# Altium PCB main.PcbDoc (part 3 of 16)
Units mil, origin at the board's own origin, x right, y up, seen from the top; angles counter-clockwise.
Board outline 8394.75 x 5164.44 mil, 7 copper layers (Top Layer 1, Layer 2, Layer 3, Unused, Layer 4_pow, Layer 5_gnd, Bottom 6+gnd), stack 64.043 mil thick; 364 components, 409 nets, 1932 pads, 1061 vias.
Unrouted connection lines stored in the file: 2.
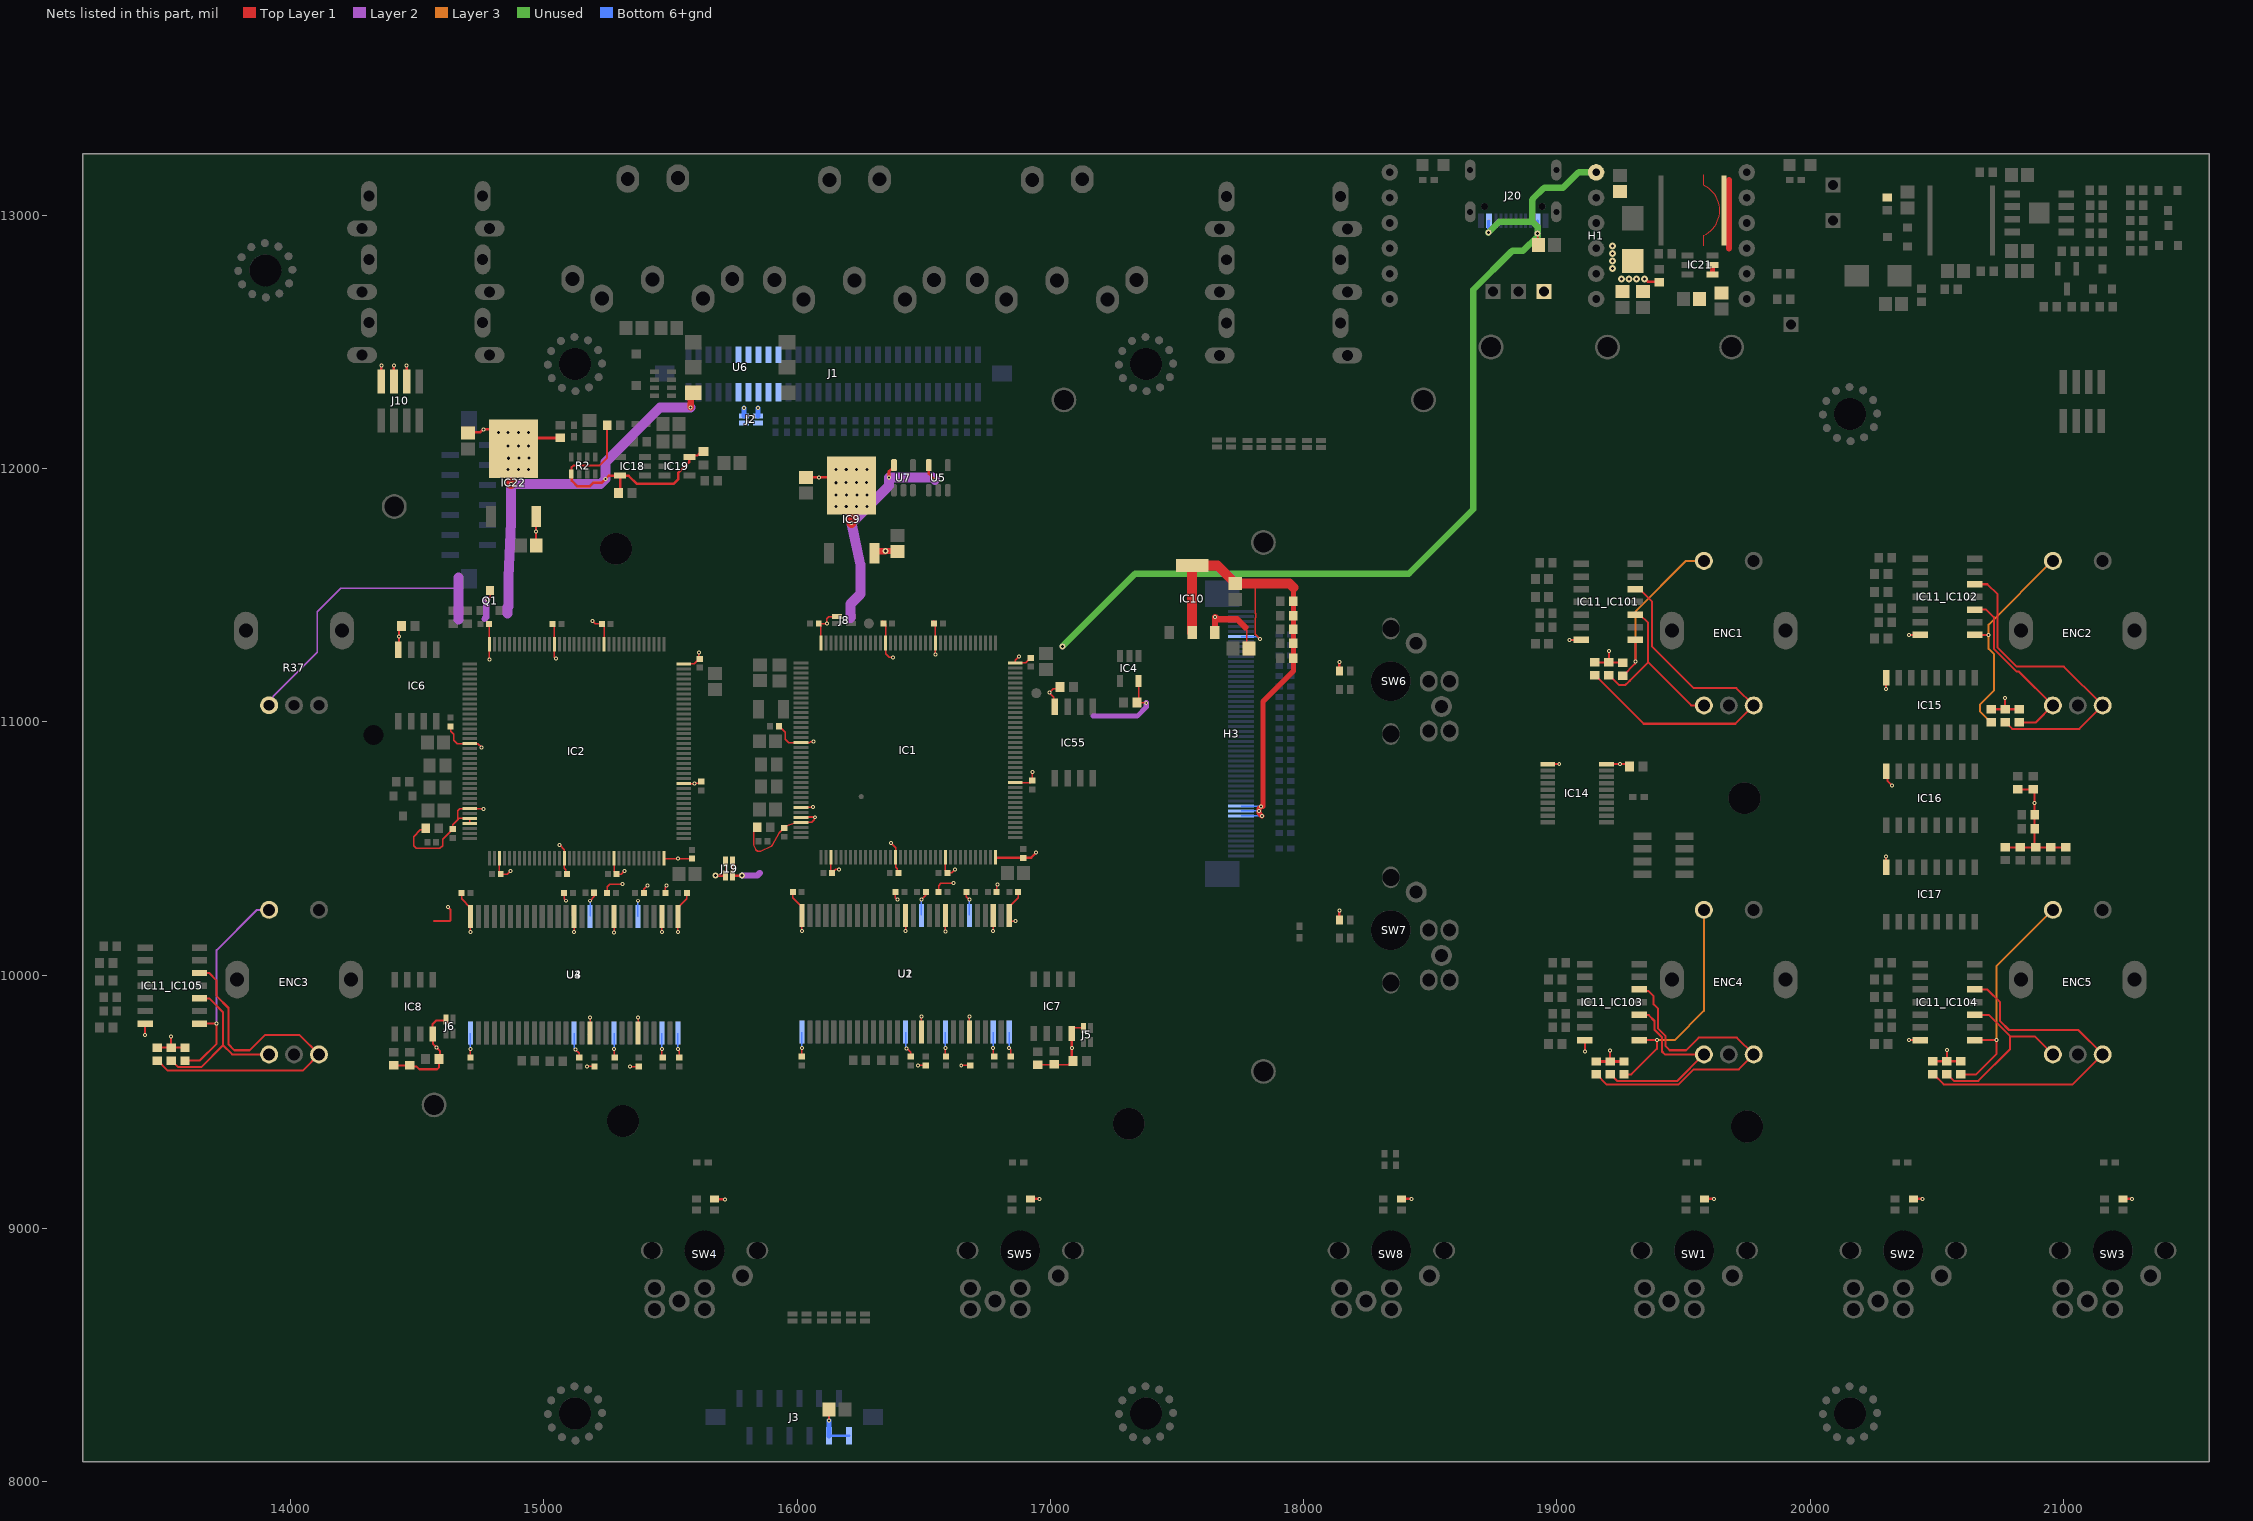
[diagram p6: the nets of this part, all layers, seen from the top]

## Via types
v1: diameter 15.75, hole 7.87, Top Layer 1 to Bottom 6+gnd, tented both sides, 961 vias
v2: diameter 27.56, hole 11.81, Top Layer 1 to Bottom 6+gnd, 45 vias
v3: diameter 23.62/23.62/23.62/23.62/23.62/23.62/23.62 (per signal layer), hole 12, Top Layer 1 to Bottom 6+gnd, tented top, 42 vias
v4: diameter 15.75, hole 7.87, Top Layer 1 to Bottom 6+gnd, 10 vias
v5: diameter 23.62/23.62/23.62/23.62/23.62/23.62/23.62 (per signal layer), hole 12, Top Layer 1 to Bottom 6+gnd, tented bottom, 3 vias

## Nets (pads, with @x,y where several pads share a name; then routed paths per layer and width w, separated by ;. In a path a pad name is that pad's centre, name@x,y a point inside that pad or via, vN(x,y) a via of type N, cw(c..) or ccw(c..) an arc to the next point about the centre after c; other vN are vias at no path point) (continued)
+5V: (continued)
  Top Layer 1 w10: J10.7@14358.32,12347.02 v1@14358.32,12411.19 ; J10.5@14408.32,12344.14 v1(14408.32,12408.32) ; J10.3@14458.32,12344.14 v1(14458.32,12408.32) ; SW4.4@15677.84,9115.31 v1(15714.71,9115.31) ; SW5.4@16921.17,9116.81 v1(16958.05,9116.81) ; SW7.4@18140.8,10218.18 v1(18140.8,10255.06) ; SW6.4@18140.8,11200.77 v1(18140.8,11237.65) ; SW8.4@18386.42,9116.81 v1(18426.81,9116.81) ; R32.2@19155,9659.41 R29.2@19210,9659.41 R35.2@19265,9659.41 ; 19357.8,12739.99 19358.98,12738.81 R17.2@19407.8,12738.81 ; SW1.4@19582.58,9116.81 v1(19619.45,9116.81) ; SW2.4@20407.69,9116.81 v1(20444.56,9116.81) ; R33.2@20485,9660 R36.2@20595,9660 ; R27.2@20715,11050 R25.2@20770,11050 R23.2@20825,11050 ; SW3.4@21234.46,9116.81 v1(21271.33,9116.81)
  Top Layer 1 w25: IC9.3@16305,11666.18 16305,11666.32 16312.19,11673.5 16347.58,11673.5 v3(16348.83,11674.76) 16394.36,11674.76 C72.2@16395.61,11673.5 ; IC10.3@17649.72,11353.82 17650.08,11354.17 v1(17650.08,11414.45) 17658.81,11405.72 17738.16,11405.72 17769.89,11373.99
  Bottom 6+gnd w10: J3.10@16126.77,8181.18 J3.12@16205.51,8181.18
  Bottom 6+gnd w20: J2.4@15790,12208.78 v1(15790,12240) ; v1@15845,12240 v1(15845.12,12239.88) J2.2@15845.12,12208.78 ; v1(16125.14,8241.03) 16125.14,8182.81 J3.10@16126.77,8181.18
  other v1: 19110.27,9699.49 19210.16,9703.74 20540.16,9704.33 20390.67,9743.98 13528.31,9758.74 13425.71,9764.49 20300.16,10468.15 20770.16,11094.33 20299.84,11129.49 20390.67,11343.98 14358.32,12408.32
  other v2: 19255.11,12749.08 19285.11,12749.08 19315.11,12749.08 19345.11,12749.08 19219.81,12789.99 19219.81,12819.99 19219.81,12849.99 19219.81,12879.99
+5V_Out: J1.41 J1.42 J1.43 J1.44 J1.45 J1.46 J1.47 J1.48 J1.49 J1.50 J2.1 J2.3
+MCU: C11.1 C12.1 C13.1 C14.1 C15.1 C16.1 C17.1 C18.1 C19.1 C20.1 C21.1 C22.1 C23.1 C24.1 C25.1 C26.1 C27.1 C28.1 C29.1 C30.1 C31.1 C32.1 C33.1 C34.1 C35.1 C36.1 C37.1 C38.1 C39.1 C40.1 C41.1 C42.1 C43.1 C44.1 C45.1 C46.1 C47.1 C48.1 C49.1 C50.1 C51.1 C52.1 C53.1 C54.1 C55.1 C56.1 C57.1 C58.1 C59.1 C60.1 C61.1 C63.2 C64.2 C65.2 C71.2 C80.1 C81.1 C86.2 C87.2 C88.2 H1.6 IC1.17 IC1.30 IC1.32 IC1.33 IC1.39 IC1.52 IC1.62 IC1.72 IC1.84 IC1.108 IC1.121 IC1.131 IC1.144 IC2.17 IC2.30 IC2.32 IC2.33 IC2.39 IC2.52 IC2.62 IC2.72 IC2.84 IC2.108 IC2.121 IC2.131 IC2.144 IC4.5 IC6.8 IC7.8 IC8.8 IC9.4 IC18.5 IC19.5 IC22.4 IC55.8 J5.1 J6.1 J8.4 J19.1 J19.2 J19.3 J19.4 J20.A4B9 J20.B4A9 Q1.3 R2.1 R5.1 R6.1 R13.2 R14.2 R15.2 R16.2 R37.1 R103.1 R139.1 U1.1 U1.3 U1.9 U1.14 U1.27 U1.43 U1.49 U2.1 U2.3 U2.9 U2.14 U2.27 U2.43 U2.49 U3.1 U3.3 U3.9 U3.14 U3.27 U3.43 U3.49 U4.1 U4.3 U4.9 U4.14 U4.27 U4.43 U4.49 U5.5 U6.6 U7.5 | length 18724.1
  Top Layer 1 w5: R6.1@14534.32,10579.63 14528.28,10573.59 14513.02,10573.59 14486.84,10547.41 14486.84,10510.42 14496.42,10500.84 14588.81,10500.84 14599.91,10511.94 14599.91,10537.57 14639.57,10577.23 C22.1@14640.36,10577.23 14640.36,10595.07 14659.91,10614.63 ; C23.1@14631.48,10982.94 14632.6,10981.82 14632.6,10962.67 14644.54,10950.74 14644.54,10928.26 14658.17,10914.63 IC2.17@14706.68,10914.63 ; C60.1@14675.2,10324.63 14675.2,10302.23 14710.4,10267.03 U3.27@14710.4,10232.09 14710.4,10232.03 v1@14710.4,10170.19 ; IC2.33@14707.15,10599.2 IC2.32@14707.15,10618.88 14664.16,10618.88 14659.91,10614.63 ; IC2.17@14707.15,10914.16 14739.83,10914.16 14754.48,10899.5 v1(14754.48,10898.26) ; C47.1@14709.06,9674.63 14709.85,9674.63 C47.1@14710.33,9675.05 v1(14710.27,9709.43) ; v1(14761.48,10656.26) 14760.49,10657.25 14708.15,10657.25 IC2.30@14707.15,10658.25 14668.53,10658.25 14659.91,10649.63 14659.91,10614.63 ; v1(14777.89,11483.41) 14788.15,11493.68 Q1.3@14788.15,11518.19 ; C24.1@14784.4,11386.87 14785.42,11385.85 IC2.144@14785.42,11307.38 14784.86,11306.83 v1@14784.86,11247.1 ; IC2.39@14824.79,10461.87 14824.79,10404.75 C29.1@14829.91,10399.63 14855.85,10399.63 v1(14868.48,10412.26) ; C25.1@15034.4,11386.87 15041.33,11379.94 IC2.131@15041.33,11307.38 15041.33,11256.42 v1(15047.48,11250.26) ; v1(15062,10514.63) 15080.7,10495.93 IC2.52@15080.7,10461.87 15080.7,10422.52 15086.42,10416.8 15086.42,10405.44 C30.1@15092.23,10399.63 ; C59.1@15080.2,10324.63 15080.2,10302.02 v1(15088.11,10294.12) ; U3.14@15112.6,10275.1 15112.6,10239.53 U3.14@15120.1,10232.03 ; v1@15119.85,10170.19 U3.14@15119.85,10232.03 ; v1(15124.6,9706.63) 15139.85,9691.39 C48.1@15139.85,9674.63 ; v1(15169.85,9639.63) 15170.2,9639.98 C49.1@15199.85,9639.98 ; U3.43@15175.71,9764.27 15182.84,9771.4 U3.43@15182.84,9771.46 v1@15182.84,9833.24 ; v1(15182.6,10294.12) 15199.85,10311.37 C58.1@15199.85,10324.63 ; v1(15192.48,11398.26) 15203.87,11386.87 C26.1@15229.4,11386.87 15238.18,11378.09 IC2.121@15238.18,11307.38 ; C57.1@15250.2,10324.63 15250.2,10349.98 15259.74,10359.52 15309.21,10359.52 v1(15310,10360.31) ; v1(15277.08,9709.31) 15277.08,9677.39 C50.1@15279.85,9674.63 ; v1(15277.35,10167.96) U3.9@15277.35,10267.01 ; IC2.62@15277.55,10461.87 15277.55,10410.1 15287.23,10400.42 C31.1@15287.23,10399.63 15305.85,10399.63 v1(15318.48,10412.26) ; v1(15339.85,9639.63) 15374.5,9639.63 C51.1@15374.85,9639.98 ; U3.49@15371.82,9736.4 U3.49@15371.82,9771.46 v1@15371.82,9833.24 ; C56.1@15394.5,10324.63 15394.5,10339.27 v1(15409.85,10354.63) ; v1(15466.06,9709.31) 15466.06,9678.42 C52.1@15469.85,9674.63 ; v1@15466.31,10170.19 U3.3@15466.31,10232.09 U3.3@15466.31,10267.03 ; IC2.72@15476.29,10459.98 v1(15530.6,10459.98) C28.1@15584.91,10459.98 ; C55.1@15479.5,10324.63 15479.5,10346.05 15485.01,10351.56 v1(15485.01,10354.47) ; v1(15529.05,9709.31) 15529.05,9707.02 15535.24,9700.83 C53.1@15535.24,9674.63 ; v1@15529.3,10170.19 U3.1@15529.3,10232.09 15529.3,10267.03 15564.5,10302.23 C54.1@15564.5,10324.63 ; IC2.84@15552.67,10756.68 15595.31,10756.68 v1(15595.83,10757.2) 15613.43,10757.2 C32.1@15620.89,10764.66 ; IC2.108@15552.67,11229.12 15593.96,11229.12 15614.12,11249.27 C27.1@15614.91,11249.27 15612.48,11251.7 v1(15612.48,11275.26) ; J19.3@15718.15,10393.82 J19.1@15718.15,10448.94 ; J19.4@15745.71,10393.82 J19.2@15745.71,10448.94 ; R5.1@15842.56,10583.82 15829.19,10567.62 15829.19,10516.22 ccw(c15836.69,10516.22) 15829.76,10513.35 15835.99,10498.31 ccw(c15850.2,10504.19) 15856.65,10490.24 15898.11,10509.41 ccw(c15894.96,10516.22) 15901.5,10512.54 15929.46,10562.26 cw(c15936,10558.58) 15930.56,10563.75 15938.5,10572.11 C13.1@15948.6,10581.42 15958.69,10590.73 15988.86,10599.98 IC1.33@16015.39,10603.38 16057.72,10603.38 16068.47,10614.14 16068.47,10621.75 v1(16070.53,10623.8) ; C12.1@15938.15,10983.82 15938.15,10974.92 15952.78,10960.29 15952.78,10932.45 15966.41,10918.82 16014.92,10918.82 IC1.17@16015.39,10918.35 16049.38,10918.35 16052.31,10921.27 16056.83,10921.27 16057.21,10921.66 16063.07,10921.66 v1(16065.13,10923.71) ; C40.1@15983.5,10328.82 15983.5,10306.42 16018.7,10271.22 U1.27@16018.7,10236.22 v1@16018.7,10174.38 ; IC1.32@15988.86,10623.07 IC1.32@16015.39,10623.07 ; IC1.30@15988.86,10659.04 IC1.30@16015.39,10662.44 16041.93,10664.1 v1(16062.93,10664.1) ; C33.1@16017.36,9678.82 C33.1@16018.15,9678.82 16018.57,9679.24 v1(16018.57,9713.62) ; C11.1@16085.47,11388.82 C11.1@16086.09,11388.2 ; IC1.144@16093.66,11311.57 16093.66,11380.63 C11.1@16086.09,11388.2 ; IC1.39@16133.03,10466.06 16133.03,10408.94 C21.1@16138.15,10403.82 16138.15,10404.61 16147.46,10413.92 16148.25,10413.92 16152.3,10417.97 v1(16166.04,10417.97) ; J8.4@16158.03,11416.38 16125.71,11416.38 16117.24,11407.9 v1(16117.24,11388.2) C11.1@16086.09,11388.2 ; C14.1@16338.15,11398.82 16338.15,11398.03 16344.09,11392.09 16349.57,11386.61 IC1.131@16349.57,11311.57 16349.57,11269.87 16364.24,11255.2 v1(16379.24,11255.2) ; v1(16370.24,10522.2) 16388.94,10503.5 IC1.52@16388.94,10466.06 16388.94,10426.71 16394.66,10420.99 16394.66,10409.63 C20.1@16400.47,10403.82 ; C41.1@16388.5,10328.82 16388.5,10306.21 v1(16396.41,10298.31) ; U1.14@16420.9,10279.29 16420.9,10243.72 U1.14@16428.4,10236.22 ; v1@16428.15,10174.38 U1.14@16428.15,10236.22 ; v1(16432.9,9710.82) 16448.15,9695.58 C34.1@16448.15,9678.82 ; v1(16478.15,9643.82) 16478.5,9644.17 C35.1@16508.15,9644.17 ; U1.43@16484.01,9768.46 U1.43@16491.14,9775.59 v1@16491.14,9837.43 ; v1(16490.9,10298.31) 16508.15,10315.56 C46.1@16508.15,10328.82 ; C15.1@16538.15,11398.82 16546.42,11390.55 IC1.121@16546.42,11311.57 16546.47,11311.53 v1(16546.51,11265.98) v1(16546.51,11265.98) ; C42.1@16558.5,10328.82 16558.5,10354.17 16568.04,10363.71 16617.51,10363.71 v1(16618.3,10364.5) ; v1(16585.38,9713.5) 16585.38,9681.58 C36.1@16588.15,9678.82 ; v1(16585.65,10172.15) U1.9@16585.65,10271.2 ; IC1.62@16585.79,10466.06 16585.79,10414.29 C19.1@16594.65,10405.42 ; C19.1@16593.05,10403.82 16609.85,10403.82 v1(16623.24,10417.2) ; v1(16648.15,9643.82) 16682.8,9643.82 C37.1@16683.15,9644.17 ; C43.1@16668.15,10328.82 16668.15,10310.03 v1(16679.87,10298.31) ; U1.49@16679.87,9775.34 v1@16679.87,9837.18 ; U1.49@16680.12,9740.59 U1.49@16680.12,9775.59 v1@16680.12,9837.43 ; U1.49@16680.36,9775.83 v1(16680.36,9837.68) ; U1.49@16680.61,9775.59 v1@16680.61,9837.43 ; v1(16774.36,9713.5) 16774.36,9682.61 C38.1@16778.15,9678.82 ; v1(16774.36,10174.13) U1.3@16774.36,10235.97 ; v1@16774.61,10174.38 U1.3@16774.61,10236.22 U1.3@16774.61,10271.22 ; v1@16774.85,10174.13 U1.3@16774.85,10236.4 ; v1@16775.1,10174.38 U1.3@16775.1,10236.22 ; IC1.72@16782.64,10466.06 IC1.72@16784.53,10464.17 ; C44.1@16787.8,10328.82 16787.8,10350.24 16788.43,10350.88 16788.43,10356.61 v1(16790.48,10358.66) ; v1(16837.35,9713.5) 16837.35,9711.21 16843.54,9705.02 C39.1@16843.54,9678.82 ; IC1.84@16860.91,10760.87 16920.2,10760.87 C17.1@16928.15,10768.82 16929.37,10770.04 v1(16929.37,10802.45) ; v1(16862.69,10213.31) 16845.1,10213.31 16837.6,10220.81 U1.1@16837.6,10236.22 16837.6,10271.22 16872.8,10306.42 C45.1@16872.8,10328.82 ; v1(16875.24,11258.2) 16860.91,11243.87 IC1.108@16860.91,11233.31 16902.21,11233.31 16922.36,11253.46 C16.1@16923.15,11253.46 ; R14.2@16950.24,9647.2 17070.24,9647.2 C65.2@17085.24,9662.2 ; IC55.8@17018.15,11060.55 17014.37,11064.33 17014.37,11097.6 16996.38,11115.59 v1(16995.77,11115.59) 17011.68,11131.45 17030.7,11131.45 C63.2@17038.07,11138.82 ; IC7.8@17085.24,9770.43 17085.24,9782.03 17095.53,9792.32 J5.1@17136.46,9792.32 ; C61.1@17341.61,11076.73 17345.94,11076.73 17346.54,11076.14 17378.32,11076.14 v1(17378.62,11075.84) ; C61.1@17346.54,11076.73 17348.94,11079.13 IC4.5@17348.94,11162.52 ; v3@18924.23,12928.31 18924.23,12887.18 C88.2@18928.11,12883.31
  Top Layer 1 w8: R16.2@14405.3,9645.26 R16.2@14406.48,9644.08 R15.2@14471.48,9644.08 14476.09,9639.47 14497.5,9639.47 14508.15,9628.82 14578.15,9628.82 14586.3,9636.97 C64.2@14586.3,9668.82 ; IC6.8@14428.15,11293.82 v1@14428.15,11337.99 ; v1(14428.31,11338.15) 14428.31,11369.06 C86.2@14438.07,11378.82 ; 14566.48,10213.49 14628.22,10213.49 14631.48,10216.75 14631.48,10259.26 v1(14621.48,10269.26) ; C64.2@14593.15,9658.82 14593.15,9678.59 14590.61,9681.13 14590.61,9700.13 v1(14576.05,9714.69) 14561.48,9729.26 IC8.8@14561.48,9768.49 14560.48,9769.49 14560.48,9806.01 14575.73,9821.26 14609.92,9821.26 J6.1@14613.92,9825.26 ; R2.1@15108.96,11978.65 15108.96,12004.87 15116.2,12012.11 15219.19,12012.11 15250.02,12042.94 R103.1@15250.02,12172.11 ; IC19.5@15574.63,12047.11 15579.18,12051.67 15605.56,12051.67 15614.2,12060.31 15634.2,12060.31 C81.1@15641.2,12067.31 ; IC1.32@16026.2,10623.96 v1@16070.37,10623.96
  Top Layer 1 w10: C87.2@14700,12141.18 14702.99,12144.17 14749.6,12144.17 14762,12156.57 14802.57,12156.57 IC22.4@14880.24,12078.9 14922.64,12121.3 R139.1@15065,12121.3 ; R2.1@15108.96,11978.65 15110.49,11977.11 15110.49,11952.39 15132.86,11930.02 15180.93,11930.02 15196.32,11945.4 15229.5,11945.4 v1(15242.95,11958.86) 15256.4,11972.31 IC18.5@15301.2,11972.31 ; C80.1@15295,11905 15301.2,11911.2 IC18.5@15301.2,11972.31 ; IC19.5@15574.63,12047.11 15573.67,12046.16 15573.67,12026.16 15530.46,11982.94 15530.46,11957.66 15512.5,11939.71 15367.23,11939.71 15334.63,11972.31 IC18.5@15301.2,11972.31 ; v3(15678.15,10393.82) J19.3@15718.15,10393.82 ; J19.4@15745.71,10393.82 15745.84,10393.68 v3(15783.28,10393.68) ; C71.2@16035,11966.18 v1(16087.28,11966.18) 16182.95,11966.18 IC9.4@16215.24,11933.9 ; v1(16362.91,11964.41) 16362.91,11989.14 16369.27,11995.5 16376.05,11995.5 16382.6,12002.05 U7.5@16382.6,12013.82 ; U5.5@16520,12013.82 16520,11980 v1(16545,11955) ; IC1.72@16782.64,10466.06 16782.64,10464.72 16783.54,10463.82 C18.1@16893.15,10463.82 16923.85,10463.82 v1(16944.24,10484.2) ; C65.2@17085.24,9662.2 v1(17085.24,9711.82) IC7.8@17085.24,9770.43
  Top Layer 1 w25: v1@15580,12241.67 U6.6@15580,12300
  Top Layer 1 w39.37: v1(14870,11940) 14873.2,11983.42 IC22.4@14880.24,12078.9 ; v1(16215,11785) 16215.08,11838.42 IC9.4@16215.24,11933.9
  Layer 2 w5: R37.1@13915.35,11065.99 13915.35,11083.81 13931.03,11099.48 13931.03,11101.03 14105,11275 14105,11435 14198.82,11528.82 14663.15,11528.82
  Layer 2 w20: 17168.15,11022.83 17342.64,11022.83 17378.62,11058.82 v1(17378.62,11075.84)
  Layer 2 w25: 14663.15,11403.82 14668.15,11398.82 ; 14765.89,11406.56 14773.15,11413.82 14773.15,11478.68 v1(14777.89,11483.41) ; v3(15783.28,10393.68) 15783.42,10393.82 15843.15,10393.82 15853.15,10403.82
  Layer 2 w39.37: 14663.15,11403.82 14663.15,11528.82 14663.15,11569.11 cw(c14702.52,11569.11) 14663.19,11570.88 ; 14857.44,11427.44 14857.44,11453.49 14860.04,11456.09 14860.04,11570.88 14869.96,11789.11 ccw(c14830.63,11790.9) 14870,11790.9 v1(14870,11940) 15224.09,11940 v1(15242.95,11958.86) 15242.95,12025.67 15458.93,12241.65 v1(15579.97,12241.65) ; 16210,11410 16210,11465 16249.54,11504.54 16249.54,11622.18 v1(16215,11785) 16362.91,11932.91 v1(16362.91,11964.41) 16535.59,11964.41 v1(16545,11955)
  Unused w25: v5(17048.15,11298.82) 17332.32,11582.99 cw(c17337.97,11577.32) 17337.97,11585.32 18412.01,11585.32 ccw(c18412.01,11593.32) 18417.66,11587.66 18670,11840 18670,12706.96 18820.76,12857.72 cw(c18826.41,12852.05) 18826.41,12860.05 18866.17,12860.05 18923.94,12917.83 v3(18923.94,12929.01) ccw(c18916.27,12931.27) 18924.27,12931.26 18924.27,12950.55 ccw(c18916.27,12950.55) 18921.92,12956.21 18905.44,12972.7 18903.09,12975.04 ; v3@18729.42,12932.35 18769.81,12972.74 cw(c18775.43,12967.04) 18775.43,12975.04 18903.09,12975.04 ; H1.6@19154.81,13169.99 19087.97,13169.99 ccw(c19087.97,13161.99) 19082.32,13167.65 19025.89,13111.23 cw(c19020.24,13116.89) 19020.24,13108.89 18952.21,13108.89 ccw(c18952.21,13100.89) 18946.56,13106.56 18905.43,13065.43 ccw(c18911.09,13059.78) 18903.09,13059.78 18903.09,12975.04
  Bottom 6+gnd w5: v1@14710.16,9709.31 v1(14710.27,9709.43) ; v1@14710.4,9709.56 U4.27@14710.4,9771.4 ; v1@15119.85,9709.56 U4.14@15119.85,9771.4 ; U4.43@15182.84,10232.03 U4.43@15182.84,10232.09 v1@15182.84,10293.87 ; v1@15275.03,9707.26 v1(15277.08,9709.31) ; v1@15277.33,9709.56 U4.9@15277.33,9771.4 ; v1(15371.57,10294.12) 15371.57,10232.33 U4.49@15371.82,10232.09 ; v1@15466.31,9709.56 U4.3@15466.31,9771.4 ; v1@15529.3,9709.56 U4.1@15529.3,9771.4 ; v1@16018.46,9713.5 v1(16018.57,9713.62) ; v1@16018.7,9713.75 U2.27@16018.7,9775.59 ; v1@16428.15,9713.75 U2.14@16428.15,9775.59 ; U2.43@16491.14,10236.22 v1@16491.14,10298.06 ; v1@16583.33,9711.45 v1(16585.38,9713.5) ; v1@16585.63,9713.75 U2.9@16585.63,9775.59 ; U2.49@16680.12,10236.22 v1@16680.12,10298.06 ; v1@16774.61,9713.75 U2.3@16774.61,9775.59 ; v1@16837.6,9713.75 U2.1@16837.6,9775.59
  Bottom 6+gnd w12: v3(18729.12,12932.59) 18729.12,12976.17 J20.A4B9@18731.35,12978.4 ; v3(18923.94,12929.01) 18924.27,12929.33 J20.B4A9@18924.27,12978.4
  other v1: 15183.09,9833.49 15372.06,9833.49 16491.39,9837.68 14710.16,10169.94 15119.6,10169.94 15466.06,10169.94 15529.05,10169.94 16018.46,10174.13 16427.9,10174.13 14784.83,11247.06 14760.95,12155.52
  other v3: 16153.17,11850.71 16194.14,11850.97 16235.1,11851.22 16275.1,11851.22 16154.06,11896.04 16195.02,11896.3 16235.99,11896.55 16275.99,11896.55 16152.94,11944.49 16193.9,11944.75 16234.87,11945 16274.87,11945 14859.27,11995.97 14900.24,11996.22 14940.24,11996.22 16153.17,11996.85 16194.14,11997.11 16235.1,11997.36 16275.1,11997.36 14860.15,12041.3 14901.12,12041.55 14941.12,12041.55 14859.03,12089.75 14900,12090 14940,12090 14820.24,12142.36 14859.27,12142.11 14900.24,12142.36 14940.24,12142.36
+V_SYS: C69.2 C90.2 IC21.4 IC21.5 L1.1 R18.1 | length 307.4
  Top Layer 1 w20: IC21.4@19614.81,12767 IC21.5@19614.81,12804.4
  Top Layer 1 w25: 19679.81,12869.99 19679.81,13139.99
_A_ENC1: ENC1.A IC11_IC101.3 R22.1 | length 717.2
  Top Layer 1 w8: R22.1@19205,11183.82 19206.97,11183.82 19244.64,11146.15 19270.82,11146.15 19282.17,11157.5 19282.43,11157.5 19287.7,11162.77 19287.7,11163.03 19360,11235.33 19530.04,11065.28 ENC1.A@19580.33,11065.28 ; IC11_IC101.3@19310,11423.82 19327.72,11423.82 19360,11391.54 19360,11236.13
_A_ENC2: ENC2.A IC11_IC102.3 R23.1 | length 699.5
  Top Layer 1 w8: IC11_IC102.3@20649.57,11443.82 20695,11443.82 20725,11413.82 20725,11288.82 20815,11198.82 20824.74,11198.82 ENC2.A@20958.28,11065.28 20891.82,10998.82 R23.1@20825,10998.82
_A_ENC3: ENC4.A IC11_IC103.3 R29.1 | length 797.9
  Top Layer 1 w8: R29.1@19210,9608.23 19211.97,9608.23 19237.7,9582.5 19475.5,9582.5 ENC4.A@19580.33,9687.33 19517.58,9687.33 19426.49,9687.33 19415,9698.82 19415,9755.43 19385.54,9784.89 19385.54,9819.36 19362.83,9842.08 19326.74,9842.08 IC11_IC103.3@19325,9843.82
_A_ENC4: ENC5.A IC11_IC104.3 R30.1 | length 736.3
  Top Layer 1 w8: R30.1@20540,9608.82 20541.97,9608.82 20567.7,9583.09 20664.27,9583.09 20790,9708.82 20790,9758.82 ; IC11_IC104.3@20649.57,9843.82 20705,9843.82 20790,9758.82 ; ENC5.A@20958.28,9687.33 20886.79,9758.82 20790,9758.82
_A_ENC5: ENC3.A IC11_IC105.3 R28.1 | length 694.2
  Top Layer 1 w8: R28.1@13528.15,9663.23 13530.12,9663.23 13555.85,9637.5 13646.83,9637.5 13733.15,9723.82 ; IC11_IC105.3@13640.43,9908.82 13640.54,9908.71 13678.26,9908.71 13733.15,9853.82 13733.15,9723.82 ; ENC3.A@13915.36,9687.33 13769.64,9687.33 13733.15,9723.82
_B_ENC1: ENC1.B IC11_IC101.5 R24.1 | length 1497.4
  Top Layer 1 w8: R24.1@19150,11183.82 19151.97,11183.82 19342.86,10992.93 19704.83,10992.93 ENC1.B@19777.18,11065.28 19708.64,11133.82 19540,11133.82 19375,11298.82 19375,11476.54 19327.72,11523.82 IC11_IC101.5@19310,11523.82
_B_ENC2: ENC2.B IC11_IC102.5 R25.1 | length 1260.8
  Top Layer 1 w8: IC11_IC102.5@20649.57,11543.82 20700,11543.82 20740,11503.82 20740,11293.82 20815,11218.82 21001.59,11218.82 ENC2.B@21155.13,11065.28 21062.94,10973.09 20797.7,10973.09 20771.97,10998.82 R25.1@20770,10998.82
_B_ENC3: ENC4.B IC11_IC103.5 R32.1 | length 1374.9
  Top Layer 1 w8: R32.1@19155,9608.23 19156.97,9608.23 19195.7,9569.5 19480.88,9569.5 19539.8,9628.41 19718.26,9628.41 ENC4.B@19777.18,9687.33 19710.69,9753.82 19560,9753.82 19510,9703.82 19445,9703.82 19428,9720.82 19428,9760.82 19400,9788.82 19400,9867.83 19382.35,9885.48 19382.35,9916.78 19362.3,9936.84 19331.98,9936.84 IC11_IC103.5@19325,9943.82
_B_ENC4: ENC5.B IC11_IC104.5 R33.1 | length 1391.5
  Top Layer 1 w8: R33.1@20485,9608.82 20486.97,9608.82 20526.97,9568.82 21036.62,9568.82 ENC5.B@21155.13,9687.33 21058.64,9783.82 20785,9783.82 20750,9818.82 20750,9893.82 20700,9943.82 IC11_IC104.5@20649.57,9943.82
_B_ENC5: ENC3.B IC11_IC105.5 R31.1 | length 1455.9
  Top Layer 1 w8: R31.1@13473.15,9663.23 13475.12,9663.23 13513.85,9624.5 14049.37,9624.5 ENC3.B@14112.21,9687.33 14035.72,9763.82 13908.15,9763.82 13898.15,9763.82 13838.15,9703.82 13778.15,9703.82 13754.84,9727.13 13754.84,9870.51 13708.15,9917.2 13708.15,9978.82 13678.26,10008.71 13640.54,10008.71 IC11_IC105.5@13640.43,10008.82
_BTN_1: ENC1.1 IC11_IC101.1 R26.1 | length 713.1
  Top Layer 1 w8: R26.1@19260,11183.23 19261.97,11183.23 19308.09,11229.35 19308.09,11237.46 19310,11239.37 IC11_IC101.1@19310,11323.82
  Layer 3 w8: v1(19309.57,11238.94) 19309.57,11435.93 19509.78,11636.14 ENC1.1@19580.33,11636.14
_BTN_2: ENC2.1 IC11_IC102.1 R27.1 | length 849.6
  Top Layer 1 w8: IC11_IC102.1@20649.57,11343.82 v1(20705,11343.82)
  Layer 3 w8: 20715,10998.82 20713.03,10998.82 20670,11041.85 20670,11068.82 20725,11123.82 20725,11268.82 20705,11288.82 v1(20705,11343.82) 20705,11384.64 20956.5,11636.14 ENC2.1@20958.28,11636.14
_BTN_3: ENC4.1 IC11_IC103.1 R35.1 | length 908.4
  Top Layer 1 w8: R35.1@19265,9608.23 19293.73,9608.23 19395,9709.5 v1(19395,9743.82) IC11_IC103.1@19325,9743.82
  Layer 3 w8: v1(19395,9743.82) 19465,9743.82 19580.33,9859.15 ENC4.1@19580.33,10258.19
_BTN_4: ENC5.1 IC11_IC104.1 R36.1 | length 920.4
  Top Layer 1 w8: R36.1@20595,9608.82 20655,9608.82 20735,9688.82 v1(20735,9743.82) IC11_IC104.1@20649.57,9743.82
  Layer 3 w8: v1(20735,9743.82) 20735,10034.91 ENC5.1@20958.28,10258.19
_BTN_5: ENC3.1 IC11_IC105.1 R34.1 | length 862.7
  Top Layer 1 w8: R34.1@13583.15,9663.23 13641.82,9663.23 13708.15,9729.55 v1(13708.15,9808.82) IC11_IC105.1@13640.43,9808.82
  Layer 2 w8: v1(13708.15,9808.82) 13708.15,10098.82 13867.52,10258.19 ENC3.1@13915.36,10258.19